# Altium PCB Sheet1.PcbDoc
Units mil, origin at the board's own origin, x right, y up, seen from the top; angles counter-clockwise.
Board outline 6000 x 4000 mil, 2 copper layers (Top Layer, Bottom Layer); 28 components, 26 nets, 123 pads, 4 vias.
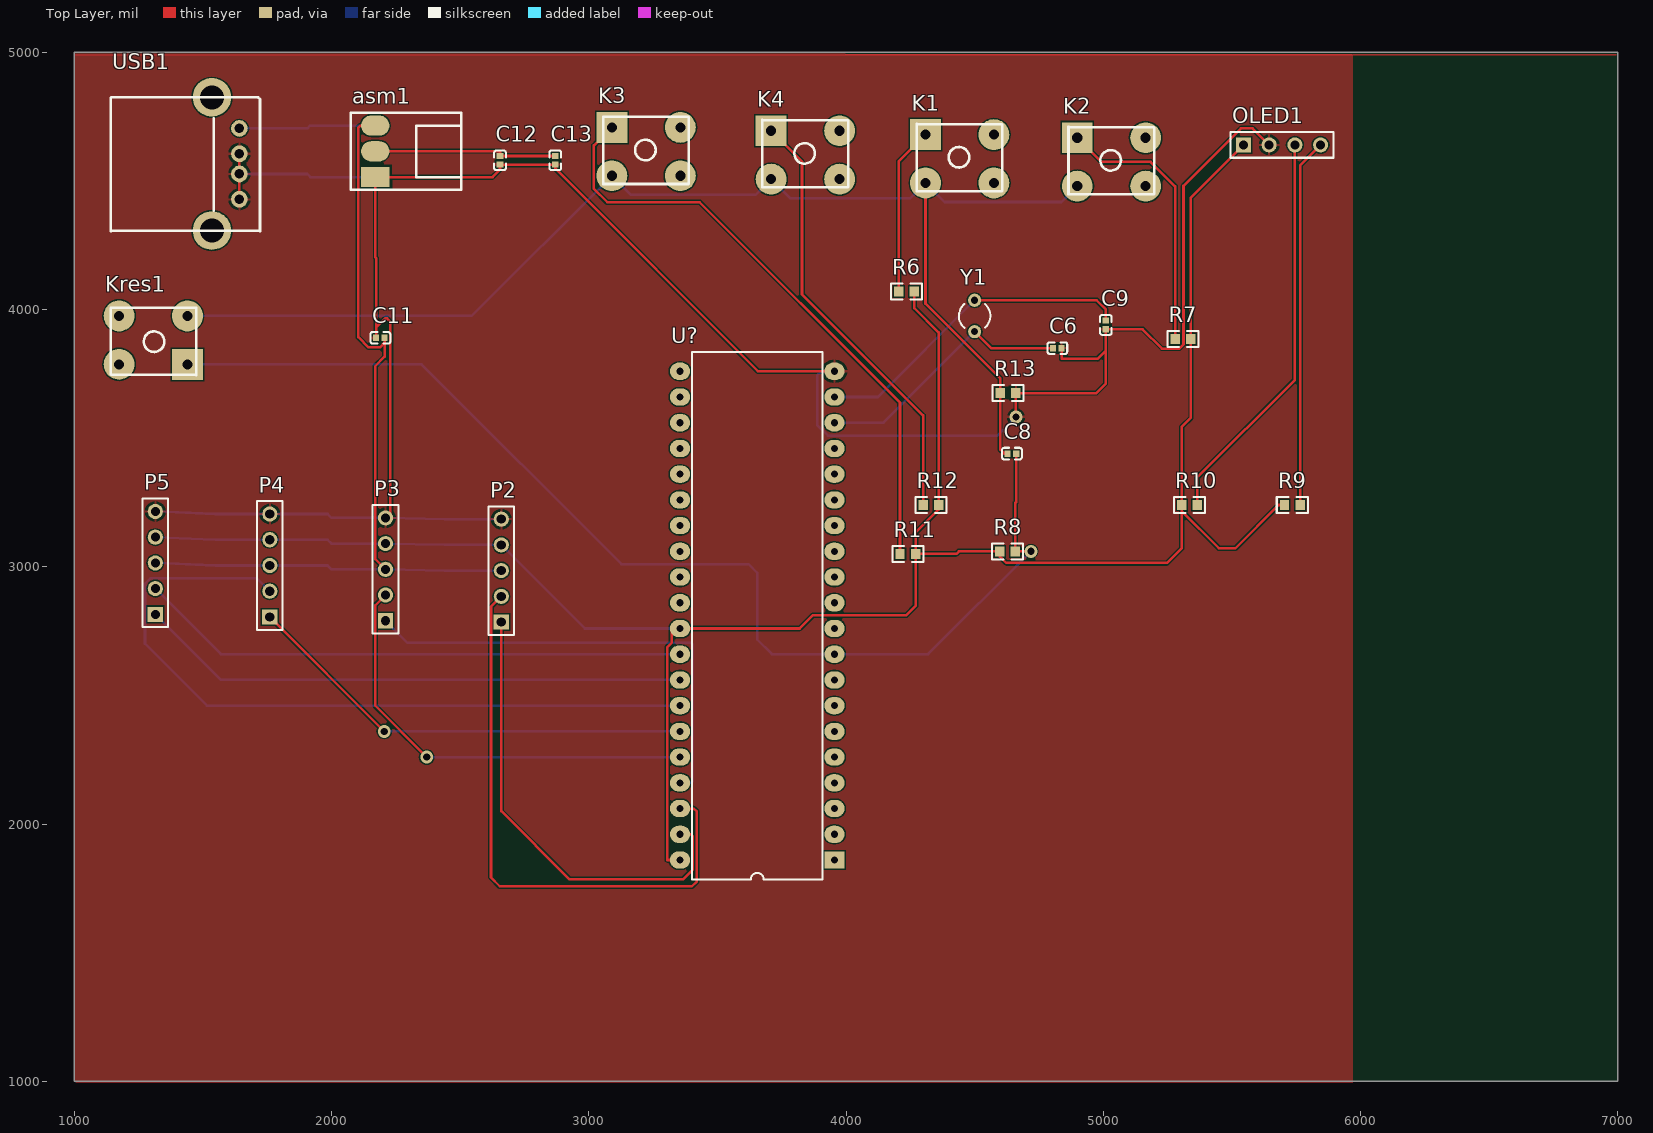
[diagram p0: Top Layer view]
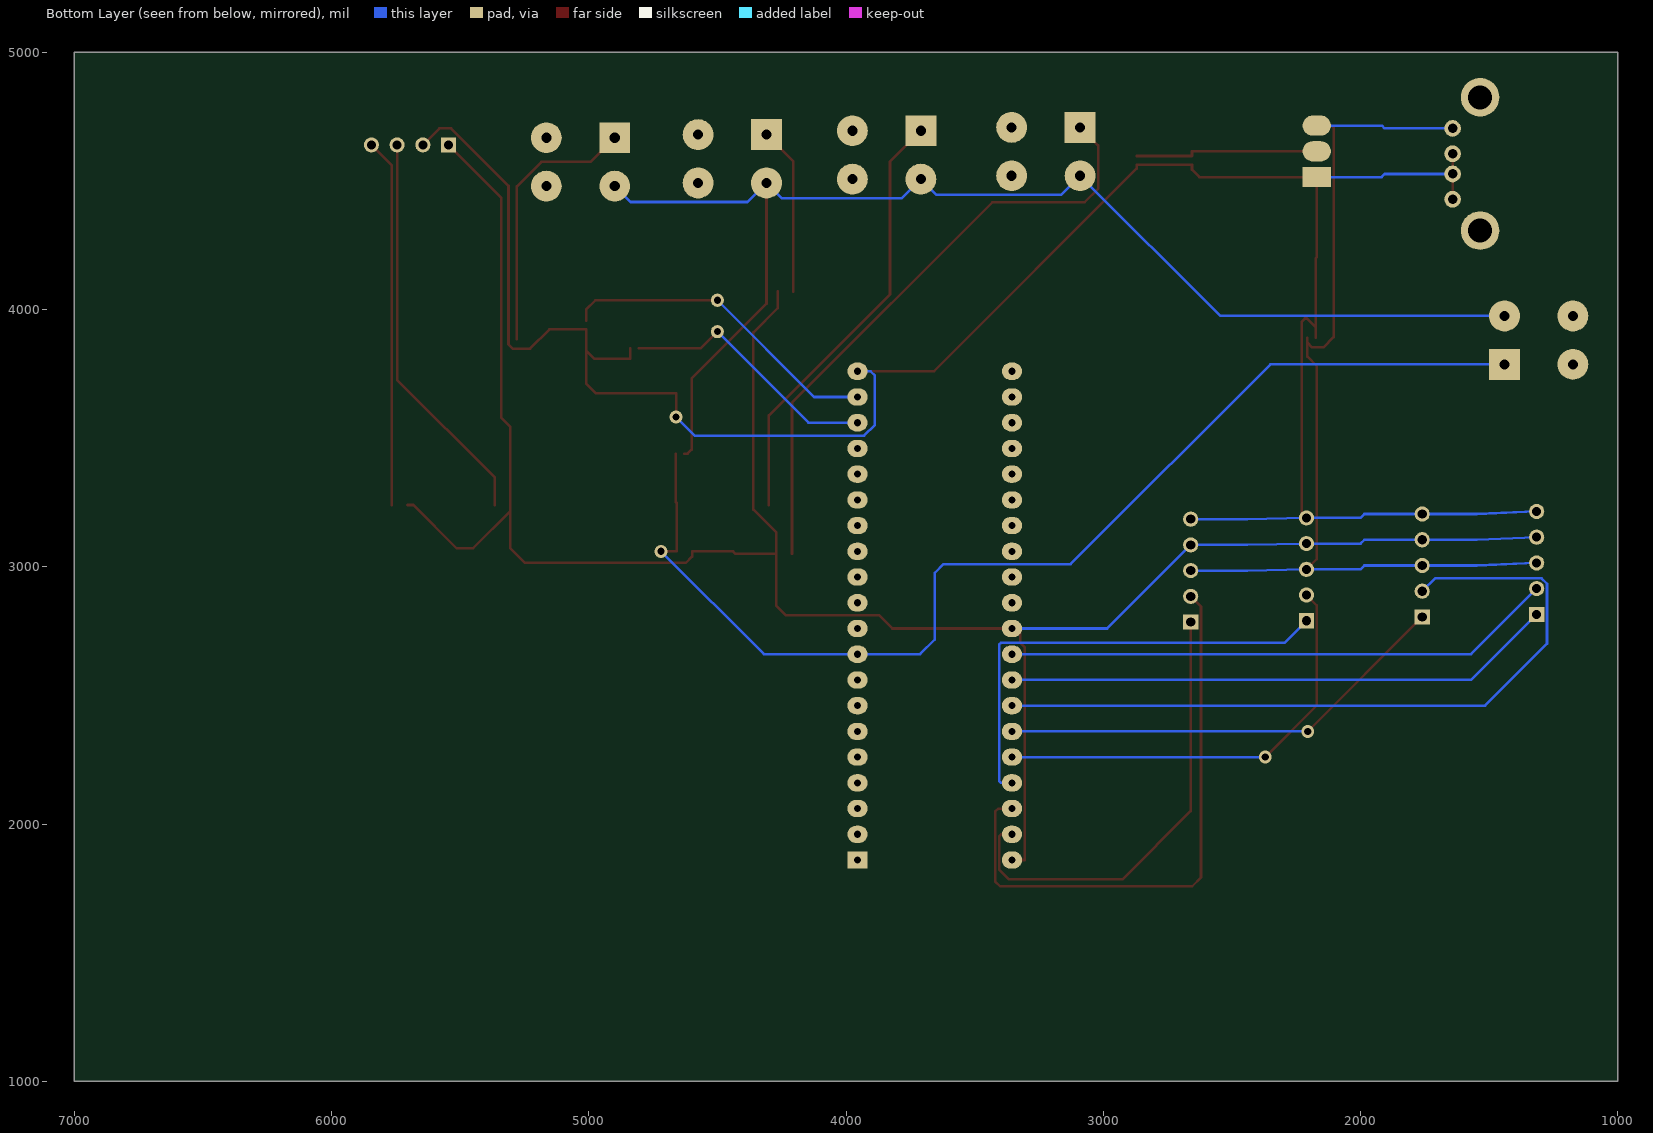
[diagram p1: Bottom Layer view, seen from below]
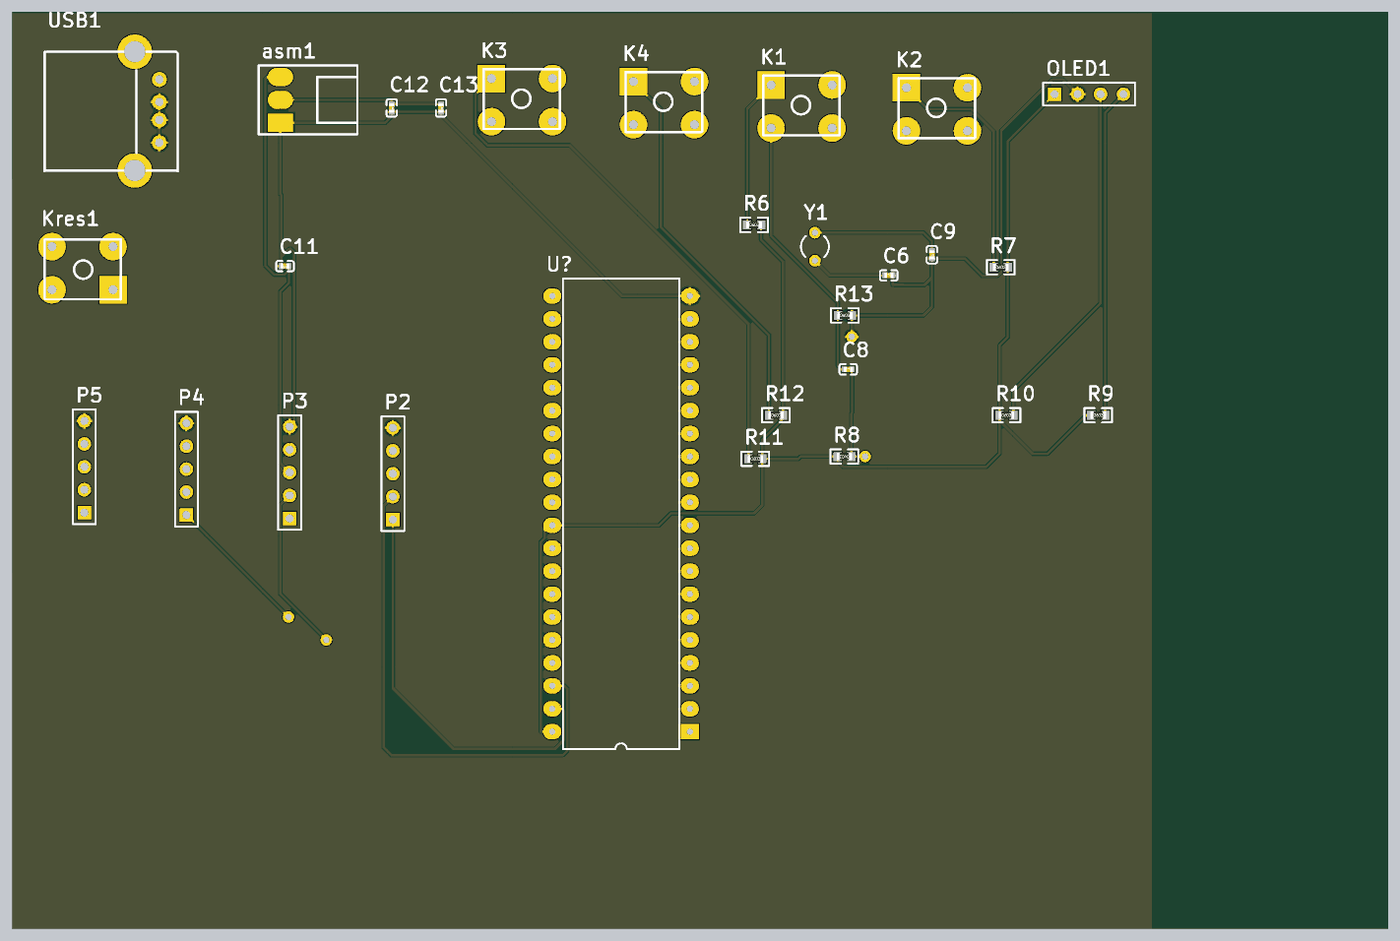
[diagram p2: 3D render of the assembled board from above, using the file's embedded part models]

## Layer stack, top to bottom
Top Solder: solder mask 0.4, Solder Resist, Dk 3.5
Top Layer: signal copper 1.4
Dielectric 1: dielectric 12.6, FR-4, Dk 4.8
Bottom Layer: signal copper 1.4
Bottom Solder: solder mask 0.4, Solder Resist, Dk 3.5

## Board outline
1000,1000 7000,1000 7000,5000 1000,5000

## Design rules (kind name [scope] priority, off if disabled: settings)
Clearance [All] p1: gap=5 ignorepadtopadclearanceinfootprint=TRUE
PolygonConnect [All] p1: connectstyle=Relief reliefconductorwidth=10 reliefentries=4 polygonreliefangle="90 Angle" airgapwidth=10
RoutingVias [All] p1: holewidth=28 width=50 viastyle="Through Hole" minholewidth=28 minwidth=50 maxholewidth=28 maxwidth=50
SolderMaskExpansion [All] p1: expansion=4
Width [All] p1: maxlimit=10 minlimit=10 preferedwidth=10
30 further rules are at their usual default settings.

## Components (designator, comment, footprint, x,y, rotation, side; value= is the part's Value field where it differs from the comment)
asm1 "ASM1117" 1117PCB 2430,4515 r180 top
C6 "10uF (106) 20% 6.3V" 0402_C 4821.73,3850 r0 top
C8 "10uF (106) 20% 6.3V" 0402_C 4645,3440 r0 top
C9 "10uF (106) 20% 6.3V" 0402_C 5010,3940 r270 top
C11 "10uF (106) 20% 6.3V" 0402_C 2190,3890 r180 top
C12 "10uF (106) 20% 6.3V" 0402_C 2655,4580 r270 top
C13 "10uF (106) 20% 6.3V" 0402_C 2870,4580 r270 top
K1 "key" KEYPCB 4349,4697 r0 top
K2 "key" KEYPCB 4939,4685 r0 top
K3 "key" KEYPCB 3130,4725 r0 top
K4 "key" KEYPCB 3749,4712 r0 top
Kres1 "key" KEYPCB 1400,3770 r180 top
OLED1 "Header 4" HDR1X4 5545,4640 r0 top
P2 "Header 5" HDR1X5 2660,2785 r90 top
P3 "Header 5" HDR1X5 2210,2790 r90 top
P4 "Header 5" HDR1X5 1760,2805 r90 top
P5 "Header 5" HDR1X5 1315,2815 r90 top
R6 "10KΩ (1002) ±1%" 0603_R 4235,4070 r0 top
R7 "10KΩ (1002) ±1%" 0603_R 5310,3885 r0 top
R8 "10KΩ (1002) ±1%" 0603_R 4628.27,3060 r180 top
R9 "10KΩ (1002) ±1%" 0603_R 5735,3240 r0 top
R10 "10KΩ (1002) ±1%" 0603_R 5335,3240 r0 top
R11 "10KΩ (1002) ±1%" 0603_R 4240.31,3050 r0 top
R12 "10KΩ (1002) ±1%" 0603_R 4330,3240 r0 top
R13 "0Ω (0R0) ±1%" 0603_R 4630.31,3675 r0 top
U? "89c52" DIP40 3655,2810 r90 top
USB1 "USBA" USB-A 1642,4704 r90 top
Y1 "XTAL" R38 4500,3975 r180 top

## Footprints (in the part's own frame and the unit in brackets; to place one, negate y for a bottom-side part, rotate by r counter-clockwise, add the part's x,y. Pads: shape width x height; smd on the part's side, far side on the other; paste and mask are expansions set on the pad)
0402_C [mm]
  rect 0.6x0.65 smd mask+0.051: 1(-0.425,0) 2(0.425,0)
  silkscreen extent -0.98,-0.58 0.97,0.58, body extent -0.48,-0.3 0.52,0.3, height 0.2
0603_R [mm]
  rect 0.93x0.98 smd: 1(-0.77,0) 2(0.77,0)
  silkscreen extent -1.53,-0.79 1.54,0.79, body extent -0.85,-0.4 0.85,0.4, height 0.56
1117PCB [mm]
  rect 2.8x2 all layers, no hole: 1(6.604,0)
  oval 2.8x2 all layers, no hole: 2(6.604,-2.54) 3(6.604,-5.08)
  silkscreen extent -1.91,-6.35 9.02,1.27
DIP40 [mm]
  rect 1.7x2 hole 0.7: 1(-24.13,-7.62)
  oval 1.7x2 hole 0.7: 2(-21.59,-7.62) 3(-19.05,-7.62) 4(-16.51,-7.62) 5(-13.97,-7.62) 6(-11.43,-7.62) 7(-8.89,-7.62) 8(-6.35,-7.62) 9(-3.81,-7.62) 10(-1.27,-7.62) 11(1.27,-7.62) 12(3.81,-7.62) 13(6.35,-7.62) 14(8.89,-7.62) 15(11.43,-7.62) 16(13.97,-7.62) 17(16.51,-7.62) 18(19.05,-7.62) 19(21.59,-7.62) 20(24.13,-7.62) 21(24.13,7.62) 22(21.59,7.62) 23(19.05,7.62) 24(16.51,7.62) 25(13.97,7.62) 26(11.43,7.62) 27(8.89,7.62) 28(6.35,7.62) 29(3.81,7.62) 30(1.27,7.62) 31(-1.27,7.62) 32(-3.81,7.62) 33(-6.35,7.62) 34(-8.89,7.62) 35(-11.43,7.62) 36(-13.97,7.62) 37(-16.51,7.62) 38(-19.05,7.62) 39(-21.59,7.62) 40(-24.13,7.62)
  silkscreen extent -26.05,-6.45 26.05,6.45
HDR1X4 [mm] "Connector; Header; 4 Position"
  rect 1.5x1.5 hole 0.9: 1(0,0)
  round 1.5 hole 0.9: 2(2.54,0) 3(5.08,0) 4(7.62,0)
  silkscreen extent -1.27,-1.27 8.89,1.27
HDR1X5 [mm] "Connector; Header; 5 Position"
  rect 1.5x1.5 hole 0.9: 1(0,0)
  round 1.5 hole 0.9: 2(2.54,0) 3(5.08,0) 4(7.62,0) 5(10.16,0)
  silkscreen extent -1.27,-1.27 11.43,1.27
KEYPCB [mil]
  rect 120x120 hole 39.37: 1(-40,-17)
  round 120 hole 39.37: 2(-40,-205) ""(226,-205) ""(226,-17)
  silkscreen extent -74,-237 259,25
R38 [mm] "Crystal, Thru-Hole; 2 Leads; Body 3.1 x 8.2 mm (Dia.xH)"
  round 1.3 hole 0.7: 1(0,1.55) 2(0,-1.55)
  silkscreen extent -1.55,-1.19 1.55,1.17
USB-A [mil]
  round 65 hole 37: 1(0,0) 2(-98.5,0) 3(-177,0) 4(-275.6,0)
  round 150 hole 93: 5(121,107) 6(-397,107)
  silkscreen extent -400,-80 121,500

## Part data
asm1: library part 1117
C6 C8 C9 C11 C12 C13: library part "0402 10uF (106) 20% 6.3V", "贴片电容", Package=0402, SuppliersPartNumber=C15525, ComponentLink1Description=供应商链接, ComponentLink1URL=http://www.szlcsc.com/product/details_16204.html, Supplier=LC
OLED1: "Header, 4-Pin", LatestRevisionDate=17-Jul-2002, LatestRevisionNote="Re-released for DXP Platform.", Publisher="Altium Limited"
P2 P3 P4 P5: "Header, 5-Pin", LatestRevisionDate=17-Jul-2002, LatestRevisionNote="Re-released for DXP Platform.", Publisher="Altium Limited"
R6 R7 R8 R9 R10 R11 R12: library part "0603 10KΩ (1002) 1%", "贴片电阻", Package=0603, SuppliersPartNumber=C25804, ComponentLink1Description=供应商链接, ComponentLink1URL=http://www.szlcsc.com/product/details_26547.html, Supplier=LC
R13: library part "0603 0Ω (0R0) 1%", "贴片电阻", Package=0603, SuppliersPartNumber=C21189, ComponentLink1Description=供应商链接, ComponentLink1URL=http://www.szlcsc.com/product/details_21903.html, Supplier=LC
U?: "AT89C52"
Y1: "Crystal Oscillator", LatestRevisionDate=17-Jul-2002, LatestRevisionNote="Re-released for DXP Platform.", PackageDescription="Crystal, Thru-Hole; 2 Leads; Body 3.1 x 8.2 mm (Dia.xH)", PackageReference=R38, Published=8-Jun-2000, Publisher="Altium Limited"

## Via types
v1: diameter 50, hole 28, Top Layer to Bottom Layer, 4 vias

## Nets (pads, with @x,y where several pads share a name; then routed paths per layer and width w, separated by ;. In a path a pad name is that pad's centre, name@x,y a point inside that pad or via, vN(x,y) a via of type N, cw(c..) or ccw(c..) an arc to the next point about the centre after c; other vN are vias at no path point)
+3V3: OLED1.1 P2.4 P3.4 P4.4 P5.4 R6.2 R7.2 R8.2 R9.1 R10.1 R11.2 R12.2 U?.31 U?.40 | length 8711.4
  Top Layer w10: U?.40 3305,1860 3305,2687 3322,2704 3322,2760 U?.31 3820,2760 3872,2812 4234.63,2812 4270.63,2848 R11.2 ; R6.2 4265.32,4005.68 4360.32,3910.68 R12.2 4360.32,3222.69 4270.63,3133 R11.2 ; OLED1.1 5340.32,4435.32 R7.2 5340.32,3579.63 5304.69,3544 R10.1 5304.69,3217.31 ; R9.1 5682,3240 5514,3072 5450,3072 5304.69,3217.31 ; R11.2 4429,3050 4439,3060 R8.2 4597.95,3040 4622.95,3015 5248,3015 5304.69,3071.69 5304.69,3217.31
  Bottom Layer w10: P5.4 1548,3105 P4.4 1985,3105 2000,3090 P3.4 2440,3085 P2.4 2985,2760 U?.31
+5V: asm1.3 C11.1 P2.3 P3.3 P4.3 P5.3 USB1.1 | length 3826.3
  Top Layer w10: asm1.3 2112,4715 2104,4707 2104,3893 2144,3853 2187.73,3853 2206.73,3872 ; C11.1 2206.73,3872 ; P3.3 2170,3030 2170,3780 2206.73,3816.73 2206.73,3872
  Bottom Layer w10: P5.3 1548,3005 P4.3 1985,3005 2000,2990 P3.3 2440,2985 P2.3 ; USB1.1 1906,4704 1917,4715 asm1.3
DGND: C8.1 K1.2 K2.2 K3.2 K4.2 Kres1.2 R13.1 | length 5043.5
  Top Layer w10: K1.2 4309,4023 4600,3732 R13.1 4600,3456 4616,3440 C8.1
  Bottom Layer w10: Kres1.2 2545,3975 K3.2 3164,4446 3648,4446 K4.2 3783,4433 4250,4433 K1.2 4383,4418 4837,4418 K2.2
DOUT: P2.1 U?.39 | length 1787.2
  Top Layer w10: P2.1 2660,2050 2925,1785 3366,1785 3405,1824 3405,1952 3397,1960 U?.39
DOUT1: P3.1 U?.37 | length 1815.8
  Bottom Layer w10: P3.1 2296,2704 3398,2704 3405,2697 3405,2168 3397,2160 U?.37
DOUT2: P4.1 U?.35 | length 1779.3
  Top Layer w10: P4.1 v1(2205,2360)
  Bottom Layer w10: v1(2205,2360) U?.35
DOUT3: P5.1 U?.33 | length 2145.6
  Bottom Layer w10: P5.1 1570,2560 U?.33
GND: asm1.1 C6.2 C9.2 C11.2 C12.2 C13.2 OLED1.2 P2.5 P3.5 P4.5 P5.5 R13.2 U?.20 USB1.2 USB1.3 USB1.4 | length 9091.6
  Top Layer w10: USB1.4 USB1.3 USB1.2 ; C11.2 2173.27,3930.27 ; P3.5 2229,3190 2229,3952 2216,3965 2208,3965 2173.27,3930.27 ; U?.20 3658,3760 2870,4548 C13.2 C12.2 2655,4544 2626,4515 asm1.1 2170,4203.27 2173.27,4200 2173.27,3930.27 ; v1(4660.63,3582.26) R13.2 4973,3675 5010,3712 5010,3840 ; C6.2 4838.46,3808.54 4978,3808 5010,3840 ; OLED1.2 5581,4704 5535,4704 5312,4481 5312,3864 5296,3848 5228,3848 5152.73,3923.27 C9.2 5010,3840
  Bottom Layer w10: P5.5 1548,3205 P4.5 1985,3205 2000,3190 P3.5 2440,3185 P2.5 ; USB1.3 1906,4527 1918,4515 asm1.1 ; U?.20 3904,3760 3888,3744 3888,3552 3930,3510 4588.37,3510 v1(4660.63,3582.26)
K1: U?.28
K1_PA4: K4.1 R12.1 | length 1699.7
  Top Layer w10: K4.1 3829,4575 3829,4059 4299.69,3588.31 R12.1
K2: U?.27
K2_PA5: K3.1 R11.1 | length 2390.2
  Top Layer w10: K3.1 3020,4638 3020,4469 3072,4417 3431,4417 4210,3638 R11.1
K3: U?.26
K3_PB0: K2.1 R7.1 | length 1052.6
  Top Layer w10: K2.1 4993,4574 5184,4574 5279.69,4478.31 R7.1
K4: U?.25
K4_PB1: K1.1 R6.1 | length 653.2
  Top Layer w10: R6.1 4204.69,4575.69 K1.1
Netasm1_2: asm1.2 C12.1 C13.1 | length 718.3
  Top Layer w10: asm1.2 2655,4615 C12.1 C13.1
NetOLED1_3: OLED1.3 R10.2 | length 1557.3
  Top Layer w10: R10.2 5365.32,3347 5745,3726.68 OLED1.3
NetOLED1_4: OLED1.4 R9.2 | length 1433
  Top Layer w10: R9.2 5765.32,4560.32 OLED1.4
NRST: C8.2 Kres1.1 R8.1 U?.9 | length 4504.9
  Top Layer w10: C8.2 4661.73,3251.15 4658.58,3248 R8.1 v1(4719,3060)
  Bottom Layer w10: Kres1.1 2350,3787 3127,3010 3621,3010 3655,2976 3655,2717 3712,2660 U?.9 4319,2660 v1(4719,3060)
OSC_IN: C6.1 U?.18 Y1.1 | length 1023.1
  Top Layer w10: Y1.1 4563.98,3850 C6.1
  Bottom Layer w10: U?.18 4146.02,3560 Y1.1
OSC_OUT: C9.1 U?.19 Y1.2 | length 1268.9
  Top Layer w10: Y1.2 4973.98,4036.02 5010,4000 C9.1
  Bottom Layer w10: U?.19 4123.98,3660 Y1.2
PD_SCK: P2.2 U?.38 | length 2272.5
  Top Layer w10: P2.2 2620,2845 2620,1792 2654,1758 3401,1758 3420,1777 3420,2048 3408,2060 U?.38
PD_SCK1: P3.2 U?.36 | length 1714.4
  Top Layer w10: P3.2 2170,2850 2170,2460 v1(2370,2260)
  Bottom Layer w10: v1(2370,2260) U?.36
PD_SCK2: P4.2 U?.34 | length 2927.2
  Bottom Layer w10: P4.2 1710,2955 1296,2955 1275,2934 1275,2701 1516,2460 U?.34
PD_SCK3: P5.2 U?.32 | length 2145.6
  Bottom Layer w10: P5.2 1570,2660 U?.32
pads on no net: K1. K2. K3. K4. Kres1. U?.1 U?.2 U?.3 U?.4 U?.5 U?.6 U?.7 U?.8 U?.10 U?.11 U?.12 U?.13 U?.14 U?.15 U?.16 U?.17 U?.21 U?.22 U?.23 U?.24 U?.29 U?.30 USB1.5 USB1.6

## Polygon pours and split planes (outlines as drawn)
GND on Top Layer "GND_L01_P002" (solid, remove dead copper, pour order 2): 1002.5,4992.5 5967.5,4992.5 5970,4990 5970,995 1000,995
GND on Top Layer "GND_L01_P000" (solid, remove dead copper, pour order 0): 1000,4995 1005,4990 6995,4990

## Other copper
Top Layer:
  pour cut-out: 3725,3149.96
  pour cut-out: 3662.22,2945
  pour cut-out: 3430,3787.43 3547.43,3670 3855,3670 3855,2956.2 3720,2821.2 3701.2,2840 3480,2840 3480,3695 3490,3705 3775,3420 3775,3055.37 3750,3030.37 3750,3185 3726.74,3208.26 3645,3208.26 3645,3300.6 3505,3440.6 3586.92,3522.53 3705,3522.53 3705,3355 3745,3315 3685,3255 3685,3260 3570,3375 3610,3415 3780,3415
  pour cut-out: 1234.34,3582.26 1256.6,3560 2385,3560 2385,3097.59 2242.41,2955 1345.16,2955 1345.16,3419.84 1150,3615